# Altium PCB PATHOS_DriveBoard.PcbDoc (part 1 of 2)
Units mm, origin at the board's own origin, x right, y up, seen from the top; angles counter-clockwise.
Board outline 131 x 135 mm, 2 copper layers (Top Layer, Bottom Layer), stack 1.57 mm thick; 68 components, 99 nets, 394 pads, 251 vias.
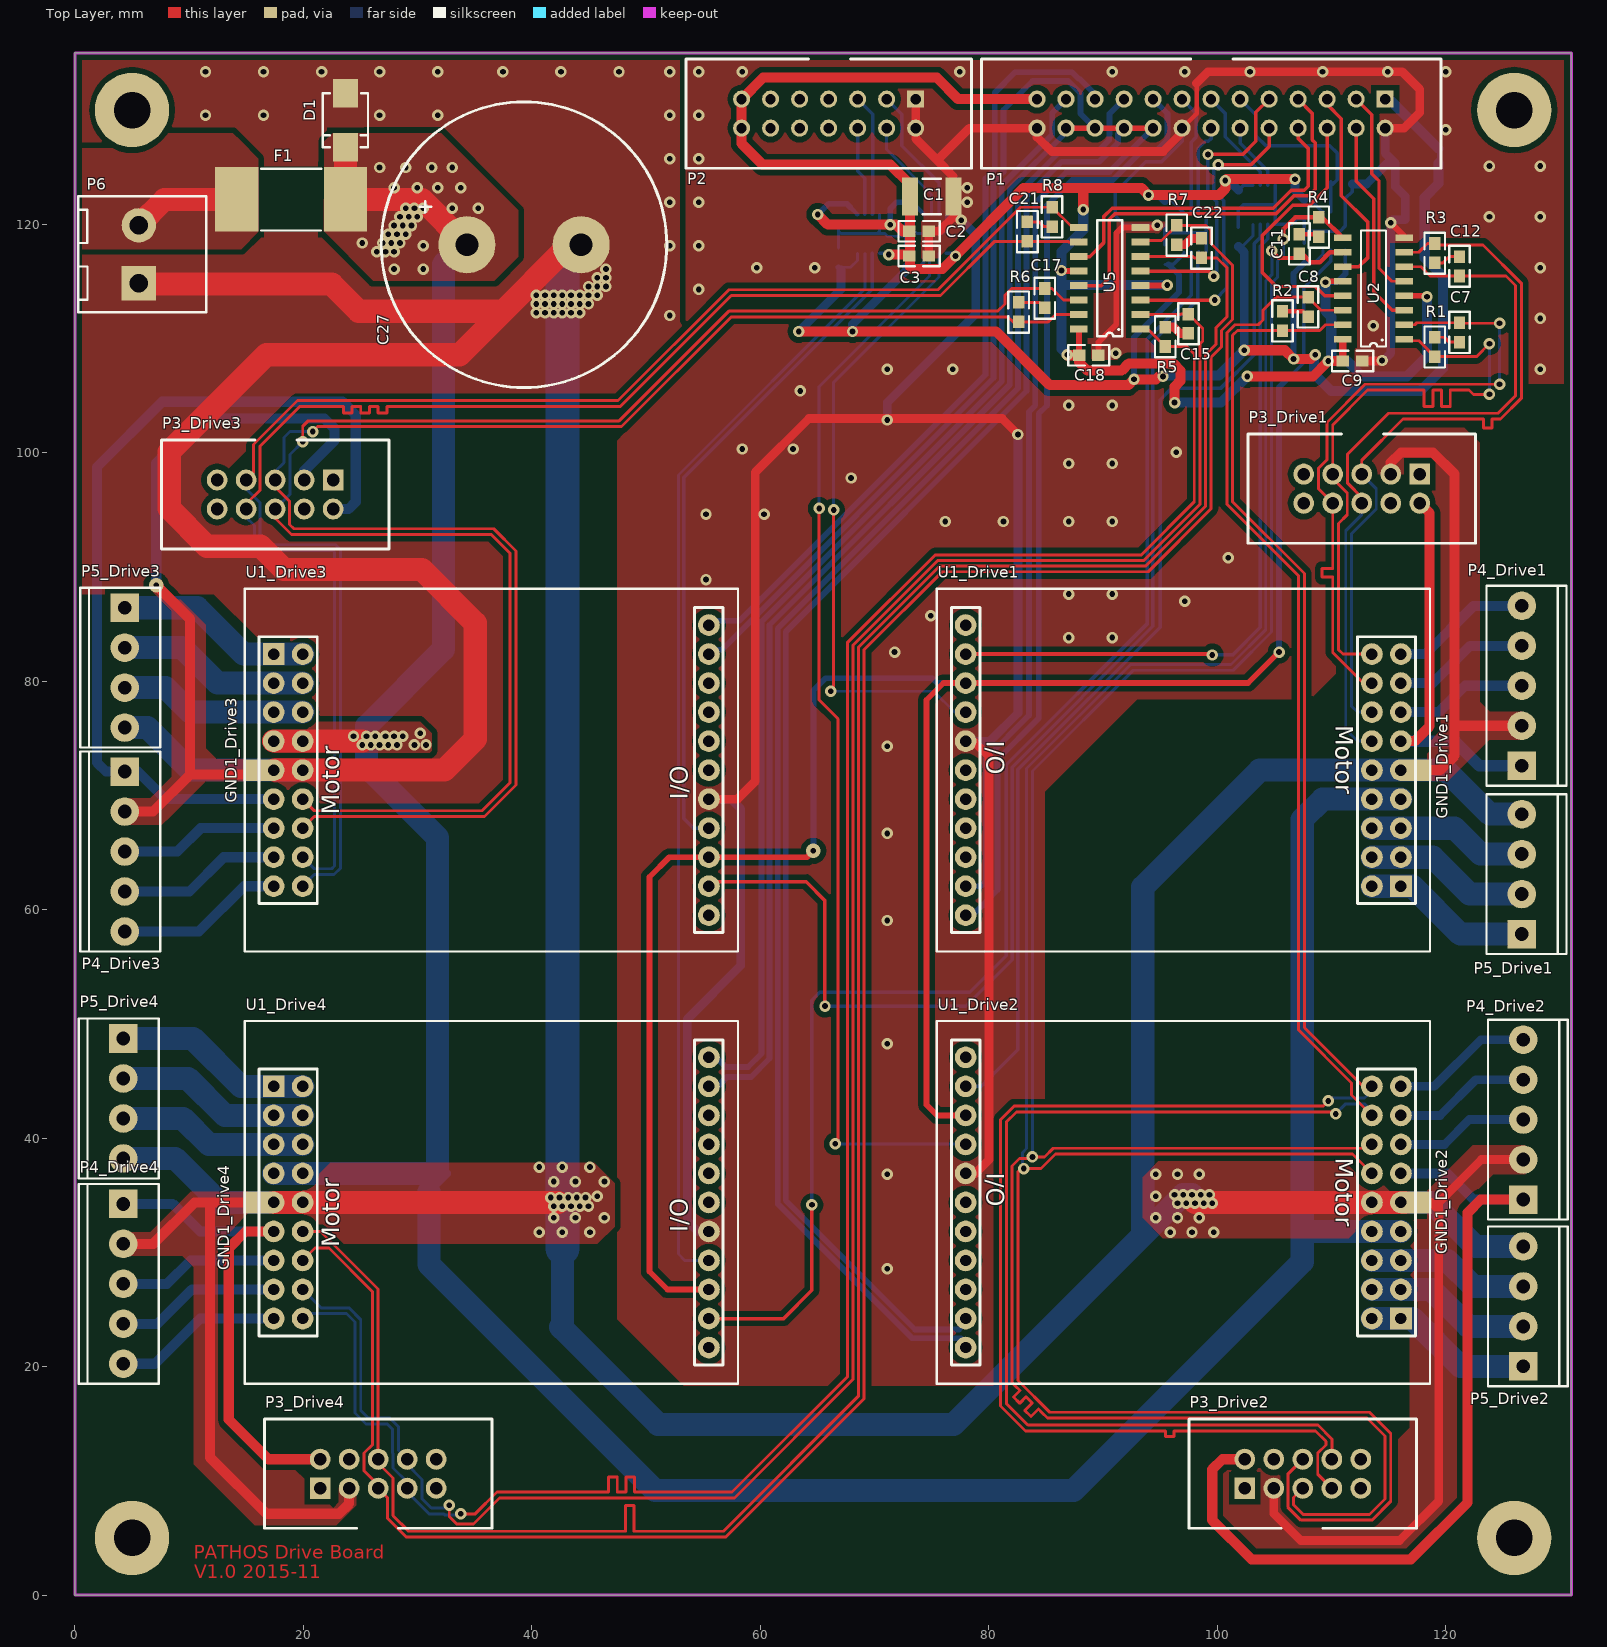
[diagram p0: Top Layer view]
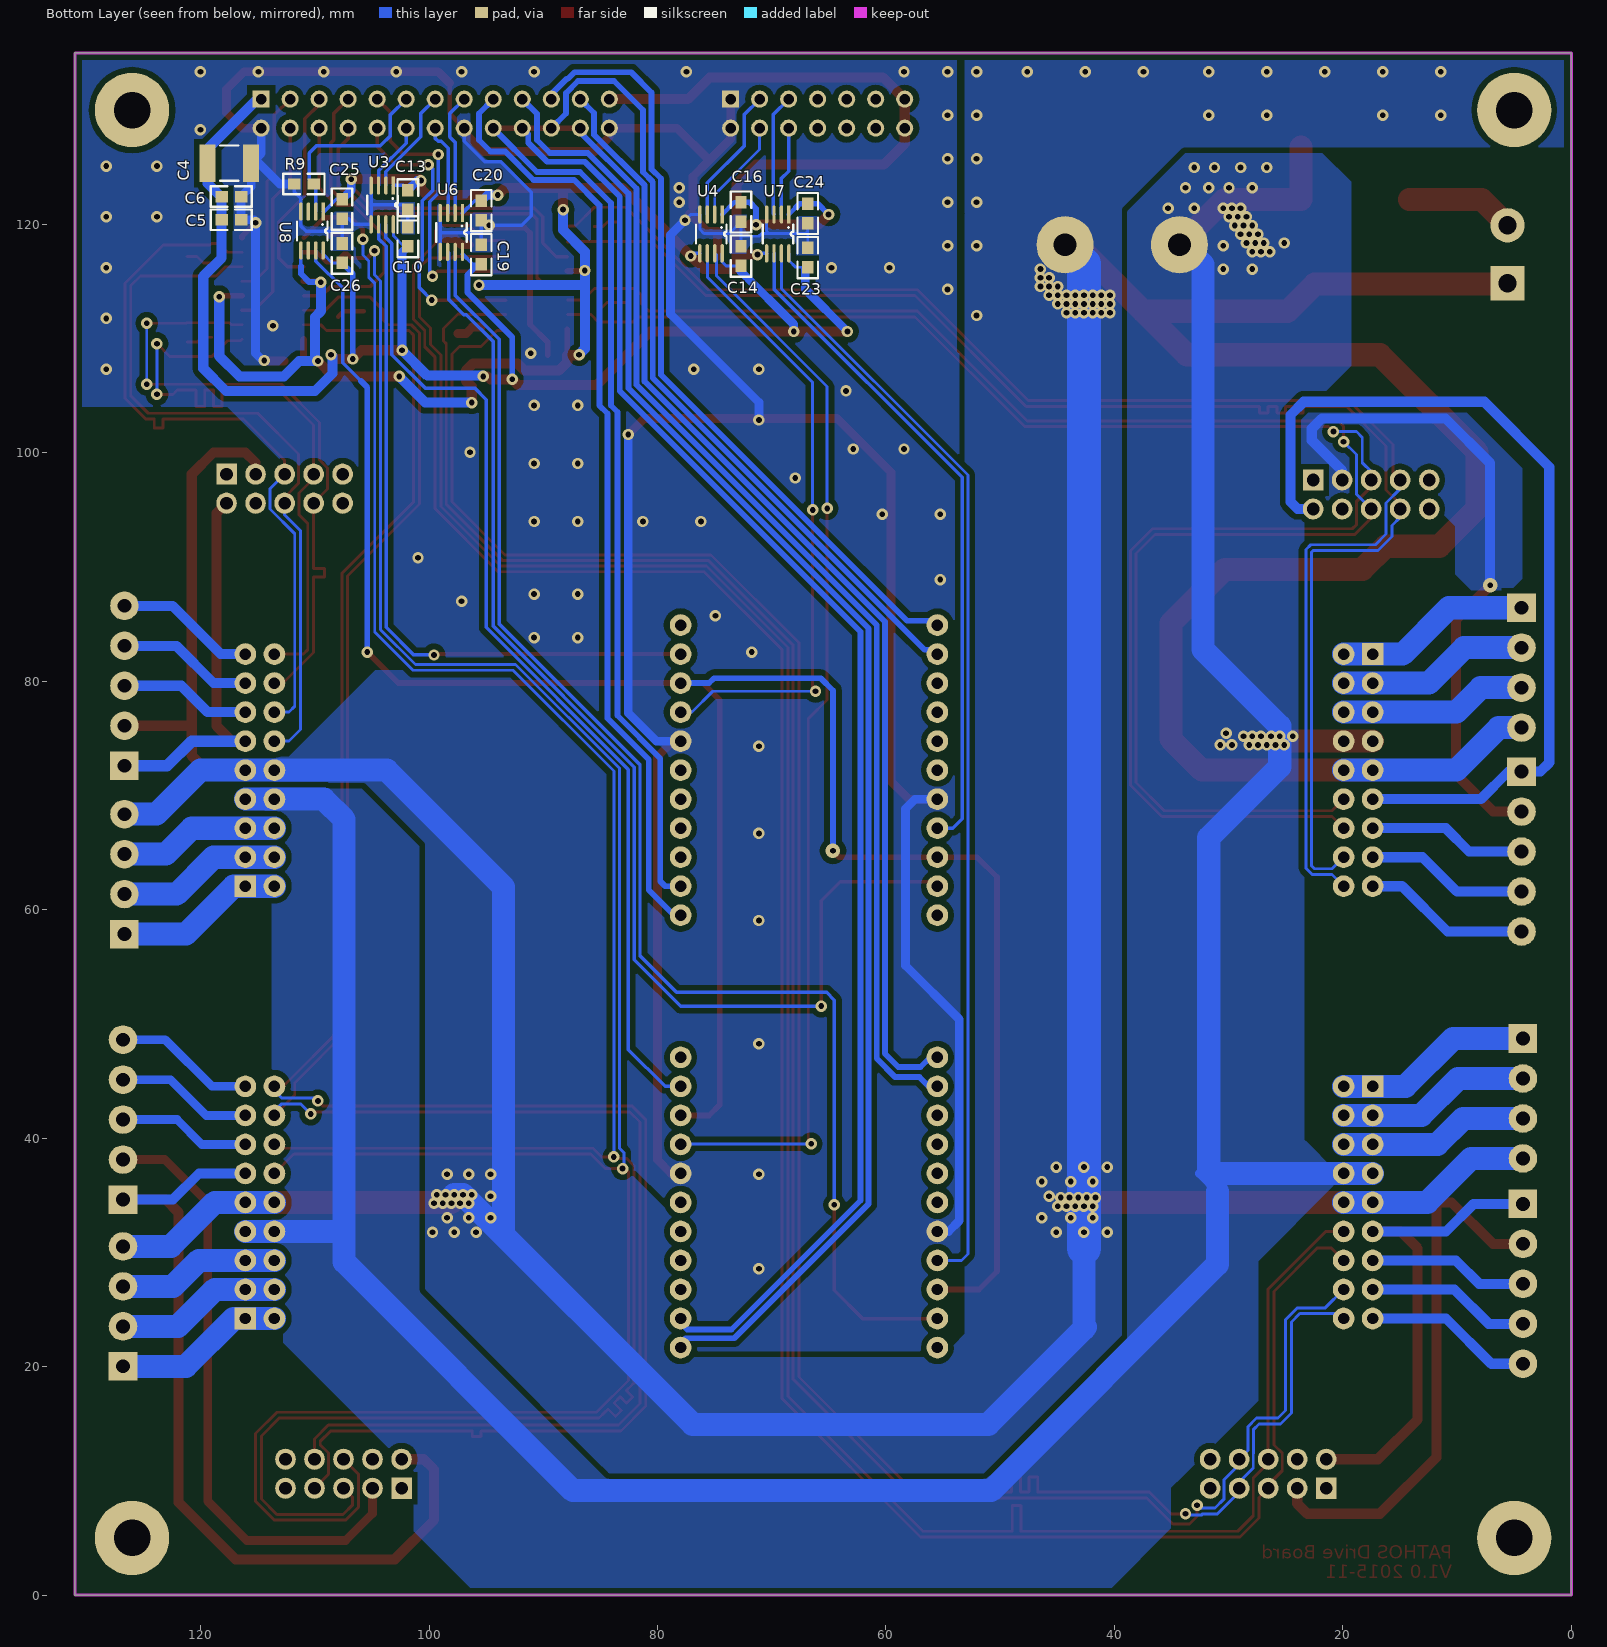
[diagram p1: Bottom Layer view, seen from below]

## Layer stack, top to bottom
Top Solder: solder mask 0.0102, Solder Resist, Dk 3.5
Top Layer: signal copper 0.035
Dielectric1: core 1.5, FR-4, Dk 4.2
Bottom Layer: signal copper 0.035
Bottom Solder: solder mask 0.0102, Solder Resist, Dk 3.5

## Board outline
0,0 131,0 131,135 0,135

## Design rules (kind name [scope] priority, off if disabled: settings)
Clearance Polygon [InPolygon] p1: gap=0.508 // Polygon Clearance
Clearance [All] p2: gap=0.203
ComponentClearance [All] p1: gap=0.254 collisioncheckmode=3 verticalgap=0.1 showdistances=FALSE
DiffPairsRouting [All] p1: maxlimit=1.524 minlimit=0.254 mostfreqgap=0.254 toplayer_minwidth=0.203 toplayer_maxwidth=0.381 toplayer_prefwidth=0.381 bottomlayer_minwidth=0.203 bottomlayer_maxwidth=0.381 bottomlayer_prefwidth=0.381 maxuncoupledlength=12.7
FabricationTestPointUsage TestPointUsage [All] p1 off: valid=0 allowmultiple=FALSE
FabricationTestpoint Testpoint [All] p1 off: side=3 testpointundercomponent=TRUE minsize=1.016 maxsize=2.54 preferedsize=1.524 minholesize=0 maxholesize=1.016 preferedholesize=0.813 testpointgrid=0.025 allowsidetop=TRUE allowsidebottom=TRUE usegrid=TRUE gridtolerance=0
FanoutControl Fanout_BGA [IsBGA] p1 off: bgadir=Out bgaviamode=Centered fanoutstyle=Auto fanoutdirection=Alternating viagrid=0.025 // Fanout_BGA (Default Rule)
FanoutControl Fanout_LCC [IsLCC] p2 off: bgadir=Out bgaviamode=Centered fanoutstyle=Auto fanoutdirection=Alternating viagrid=0.025 // Fanout_LCC (Default Rule)
FanoutControl Fanout_SOIC [IsSOIC] p3 off: bgadir=Out bgaviamode=Centered fanoutstyle=Auto fanoutdirection=Alternating viagrid=0.025 // Fanout_SOIC (Default Rule)
FanoutControl Fanout_Small [(CompPinCount < 5)] p4 off: bgadir=Out bgaviamode=Centered fanoutstyle=Auto fanoutdirection=OutThenIn viagrid=0.025 // Fanout_Small (Default Rule)
FanoutControl Fanout_Default [All] p5 off: bgadir=Out bgaviamode=Centered fanoutstyle=Auto fanoutdirection=Alternating viagrid=0.025 // Fanout_Default (Default Rule)
Height [All] p1 off: minheight=0 maxheight=25.4 prefheight=12.7
HoleSize HoleType [IsPad And HasSquareHole] p1: absolutevalues=TRUE maxlimit=0 minlimit=0 maxpercent=80.000 minpercent=20.000 // Find Square Holes
HoleSize [All] p2: absolutevalues=TRUE maxlimit=5 minlimit=0.4 maxpercent=80.000 minpercent=20.000
LayerPairs [All] p1 off: enforce=TRUE
MatchedLengths ENC_B_DIFF_4 [InNetClass('ENC_B_DIFF_4')] p1: tolerance=0.254 checknetsindiffpair=TRUE checkdiffpairvsdiffpair=TRUE checkothers=TRUE
MatchedLengths ENC_A_DIFF_4 [InNetClass('ENC_A_DIFF_4')] p2: tolerance=0.254 checknetsindiffpair=TRUE checkdiffpairvsdiffpair=TRUE checkothers=TRUE
MatchedLengths ENC_A_DIFF_3 [InNetClass('ENC_A_DIFF_3')] p3: tolerance=0.254 checknetsindiffpair=TRUE checkdiffpairvsdiffpair=TRUE checkothers=TRUE
MatchedLengths ENC_B_DIFF_3 [InNetClass('ENC_B_DIFF_3')] p4: tolerance=0.254 checknetsindiffpair=TRUE checkdiffpairvsdiffpair=TRUE checkothers=TRUE
MatchedLengths ENC_B_DIFF_2 [InNetClass('ENC_B_DIFF_2')] p5: tolerance=0.254 checknetsindiffpair=TRUE checkdiffpairvsdiffpair=TRUE checkothers=TRUE
MatchedLengths ENC_A_DIFF_2 [InNetClass('ENC_A_DIFF_2')] p6: tolerance=0.254 checknetsindiffpair=TRUE checkdiffpairvsdiffpair=TRUE checkothers=TRUE
MatchedLengths ENC_B_DIFF_1 [InNetClass('ENC_B_DIFF_1')] p7: tolerance=0.254 checknetsindiffpair=TRUE checkdiffpairvsdiffpair=TRUE checkothers=TRUE
MatchedLengths ENC_A_DIFF_1 [InNetClass('ENC_A_DIFF_1')] p8: tolerance=0.254 checknetsindiffpair=TRUE checkdiffpairvsdiffpair=TRUE checkothers=TRUE
MinimumAnnularRing "Minimum Annular Ring" [All] p1: minimumring=0.2
PasteMaskExpansion [All] p1: expansion=0.05
PolygonConnect PolygonConnectVia [IsVia] p1: connectstyle=Direct reliefconductorwidth=0.254 reliefentries=4 polygonreliefangle="90 Angle" airgapwidth=0.254 // Direct Connect Via
PolygonConnect [All] p2: connectstyle=Direct reliefconductorwidth=0.508 reliefentries=4 polygonreliefangle="45 Angle" airgapwidth=0.254
RoutingCorners [All] p1 off: cornerstyle=45-Degree minsetback=2.54 maxsetback=2.54
RoutingLayers [All] p1 off: top layer_v5=TRUE bottom layer_v5=TRUE
RoutingPriority [All] p1 off: routingpriority=0
RoutingTopology [All] p1 off: topology=Shortest
RoutingVias [All] p1: holewidth=0.4 width=0.8 viastyle="Through Hole" minholewidth=0.3 minwidth=0.7 maxholewidth=2 maxwidth=3.4
SignalStimulus "#Version Information" [All] p1 off: kind=1 level=0 starttime=10.00n stoptime=60.00n periodtime=100.00n // Version 0-9 from 2010-11-01
SilkToSolderMaskClearance SilkscreenOverComponentPads [IsPad] p1: minsilkscreentomaskgap=0.254 clearancetoexposedcopper=TRUE
SolderMaskExpansion [All] p1: expansion=0.05
Width [All] p1: maxlimit=20 minlimit=0.203 preferedwidth=0.381 minimp=50.000000 maximp=50.000000 favimp=50.000000
12 further rules are at their usual default settings.

## Classes and differential pairs
net class ENC_B_DIFF_4: ENC_B_DIFF_N4 ENC_B_DIFF_P4
net class ENC_B_DIFF_3: ENC_B_DIFF_N3 ENC_B_DIFF_P3
net class ENC_A_DIFF_4: ENC_A_DIFF_N4 ENC_A_DIFF_P4
net class ENC_A_DIFF_3: ENC_A_DIFF_N3 ENC_A_DIFF_P3
channel class PATHOS_Drive: Drive1 Drive2 Drive3 Drive4
net class READY_DRV[1..4]: READY_DRV1 READY_DRV2 READY_DRV3 READY_DRV4
net class PWM[1..4]: PWM1 PWM2 PWM3 PWM4
net class ENC_B_DIFF_P[1..4]: ENC_B_DIFF_P1 ENC_B_DIFF_P2 ENC_B_DIFF_P3 ENC_B_DIFF_P4
net class ENC_B_DIFF_N[1..4]: ENC_B_DIFF_N1 ENC_B_DIFF_N2 ENC_B_DIFF_N3 ENC_B_DIFF_N4
net class ENC_A_DIFF_P[1..4]: ENC_A_DIFF_P1 ENC_A_DIFF_P2 ENC_A_DIFF_P3 ENC_A_DIFF_P4
net class ENC_A_DIFF_N[1..4]: ENC_A_DIFF_N1 ENC_A_DIFF_N2 ENC_A_DIFF_N3 ENC_A_DIFF_N4
net class DRV_AOUT_H.AOUT_H_A[1..4]: AOUT_H_A1 AOUT_H_A2 AOUT_H_A3 AOUT_H_A4 DRV_AOUT_H.AOUT_H_A1 DRV_AOUT_H.AOUT_H_A2 DRV_AOUT_H.AOUT_H_A3 DRV_AOUT_H.AOUT_H_A4
component class PowerSupply: C27 D1 F1 P6
component class DriveConnectors: C7 C8 C9 C10 C11 C12 C13 C14 C15 C16 C17 C18 C19 C20 C21 C22 C23 C24 C25 C26 R1 R2 R3 R4 R5 R6 R7 R8 R9 U2 U3 U4 U5 U6 U7 U8
component class Drive4: GND1_Drive4 P3_Drive4 P4_Drive4 P5_Drive4 U1_Drive4
component class Drive3: GND1_Drive3 P3_Drive3 P4_Drive3 P5_Drive3 U1_Drive3
component class Drive2: GND1_Drive2 P3_Drive2 P4_Drive2 P5_Drive2 U1_Drive2
component class Drive1: GND1_Drive1 P3_Drive1 P4_Drive1 P5_Drive1 U1_Drive1
component class ControllerBoardInterface: C1 C2 C3 C4 C5 C6 P1 P2
net class ENC_A_DIFF_1: ENC_A_DIFF_N1 ENC_A_DIFF_P1
net class ENC_A_DIFF_2: ENC_A_DIFF_N2 ENC_A_DIFF_P2
net class ENC_B_DIFF_1: ENC_B_DIFF_N1 ENC_B_DIFF_P1
net class ENC_B_DIFF_2: ENC_B_DIFF_N2 ENC_B_DIFF_P2
differential pair ENC_B_DIFF4: +ENC_B_DIFF_P4 -ENC_B_DIFF_N4
differential pair ENC_B_DIFF3: +ENC_B_DIFF_P3 -ENC_B_DIFF_N3
differential pair ENC_B_DIFF2: +ENC_B_DIFF_P2 -ENC_B_DIFF_N2
differential pair ENC_B_DIFF1: +ENC_B_DIFF_P1 -ENC_B_DIFF_N1
differential pair ENC_A_DIFF4: +ENC_A_DIFF_P4 -ENC_A_DIFF_N4
differential pair ENC_A_DIFF3: +ENC_A_DIFF_P3 -ENC_A_DIFF_N3
differential pair ENC_A_DIFF2: +ENC_A_DIFF_P2 -ENC_A_DIFF_N2
differential pair ENC_A_DIFF1: +ENC_A_DIFF_P1 -ENC_A_DIFF_N1

## Components (designator, comment, footprint, x,y, rotation, side; value= is the part's Value field where it differs from the comment)
C1 "Cap" 1812 75,122.433 r180 top
C2 "Cap" 0603_3D 74.746,119.385 r180 top
C3 "Cap" 0603_3D 74.746,117.226 r180 top
C4 "Cap" 1812 117.475,125.349 r0 bottom
C5 "Cap" 0603_3D 116.459,120.396 r0 bottom
C6 "Cap" 0603_3D 116.459,122.428 r0 bottom
C7 "Cap" 0603_3D 121.205,109.681 r90 top
C8 "Cap" 0603_3D 107.95,113.618 r270 top
C9 "Cap" 0603_3D 112.696,108.03 r180 top
C10 "Cap" 0603_3D 101.854,119.761 r270 bottom
C11 "Cap" 0603_3D 107.188,117.428 r90 top
C12 "Cap" 0603_3D 121.205,117.174 r270 top
C13 "Cap" 0603_3D 101.854,121.285 r90 bottom
C14 "Cap" 0603_3D 72.691,118.063 r270 bottom
C15 "Cap" 0603_3D 97.475,110.443 r90 top
C16 "Cap" 0603_3D 72.691,120.222 r90 bottom
C17 "Cap" 0603_3D 84.902,114.38 r270 top
C18 "Cap" 0603_3D 89.601,108.538 r180 top
C19 "Cap" 0603_3D 95.424,118.19 r270 bottom
C20 "Cap" 0603_3D 95.424,120.349 r90 bottom
C21 "Cap" 0603_3D 83.378,118.508 r90 top
C22 "Cap" 0603_3D 98.618,118.762 r270 top
C23 "Cap" 0603_3D 66.849,117.936 r270 bottom
C24 "Cap" 0603_3D 66.849,120.095 r90 bottom
C25 "Cap" 0603_3D 107.616,120.476 r90 bottom
C26 "Cap" 0603_3D 107.616,118.317 r270 bottom
C27 "10mF" Cap_SLP_C7_10mF 34.315,118.212 r0 top
D1 "SMBJ54A" TVS_DO214AA 23.673,129.108 r270 top
F1 "Fuse 1" Fuse40ASMD 18.923,122.174 r0 top
GND1_Drive1 "Starpoint DGND - PWR_GND" NETTIEPWRGND 116.967,72.216 r90 top net-tie (schematic designator GND1)
GND1_Drive2 "Starpoint DGND - PWR_GND" NETTIEPWRGND 116.967,34.37 r90 top net-tie (schematic designator GND1)
GND1_Drive3 "Starpoint DGND - PWR_GND" NETTIEPWRGND 16.51,72.216 r270 top net-tie (schematic designator GND1)
GND1_Drive4 "Starpoint DGND - PWR_GND" NETTIEPWRGND 16.51,34.37 r270 top net-tie (schematic designator GND1)
P1 "Header 2x13" Wannenstecker26Pol 114.7,130.953 r0 top
P2 "Header 2x7" Wannenstecker14Pol 73.6,130.953 r0 top
P3_Drive1 "Connector Encoder" "WANNENSTECKER 2X5 - H" 117.729,98.124 r180 top (schematic designator P3)
P3_Drive2 "Connector Encoder" "WANNENSTECKER 2X5 - H" 102.409,9.351 r0 top (schematic designator P3)
P3_Drive3 "Connector Encoder" "WANNENSTECKER 2X5 - H" 22.606,97.616 r180 top (schematic designator P3)
P3_Drive4 "Connector Encoder" "WANNENSTECKER 2X5 - H" 21.463,9.351 r0 top (schematic designator P3)
P4_Drive1 "Connector Hall Sensors" PhoenixHeaderScrew_3_5mm_5pol 126.666,72.597 r180 top (schematic designator P4)
P4_Drive2 "Connector Hall Sensors" PhoenixHeaderScrew_3_5mm_5pol 126.793,34.624 r180 top (schematic designator P4)
P4_Drive3 "Connector Hall Sensors" PhoenixHeaderScrew_3_5mm_5pol 4.365,72.089 r0 top (schematic designator P4)
P4_Drive4 "Connector Hall Sensors" PhoenixHeaderScrew_3_5mm_5pol 4.238,34.243 r0 top (schematic designator P4)
P5_Drive1 "Motor Header" PhoenixHeaderScrew_3_5mm_4pol 126.666,57.865 r180 top (schematic designator P5)
P5_Drive2 "Motor Header" PhoenixHeaderScrew_3_5mm_4pol 126.793,20.019 r180 top (schematic designator P5)
P5_Drive3 "Motor Header" PhoenixHeaderScrew_3_5mm_4pol 4.365,86.44 r0 top (schematic designator P5)
P5_Drive4 "Motor Header" PhoenixHeaderScrew_3_5mm_4pol 4.238,48.721 r0 top (schematic designator P5)
P6 "Header 24V Power Supply for Drives" PhoenixHeader5_08_Vertical_unsymetric 5.588,114.833 r90 top
R1 "Res2" 0603_3D 119.046,108.411 r90 top
R2 "Res2" 0603_3D 105.711,110.697 r90 top
R3 "Res2" 0603_3D 119.046,118.317 r270 top
R4 "Res2" 0603_3D 108.886,120.603 r270 top
R5 "Res2" 0603_3D 95.443,109.3 r90 top
R6 "Res2" 0603_3D 82.616,111.459 r90 top
R7 "Res2" 0603_3D 96.459,119.905 r270 top
R8 "Res2" 0603_3D 85.537,121.492 r270 top
R9 "Res2" 0603_3D 111.807,123.524 r180 bottom
U1_Drive1 "Maxon ESCON 50/5 Drive" ESCON_MODULE_50/5 116.078,62.056 r180 top (schematic designator U1)
U1_Drive2 "Maxon ESCON 50/5 Drive" ESCON_MODULE_50/5 116.078,24.21 r180 top (schematic designator U1)
U1_Drive3 "Maxon ESCON 50/5 Drive" ESCON_MODULE_50/5 17.399,82.376 r0 top (schematic designator U1)
U1_Drive4 "Maxon ESCON 50/5 Drive" ESCON_MODULE_50/5 17.399,44.53 r0 top (schematic designator U1)
U2 "AM26LV32CD" SOP16 116.379,109.935 r180 top
U3 "74LVC2T45" 74LVC2T45 103.124,123.397 r270 bottom
U4 "74LVC2T45" 74LVC2T45 74.342,120.857 r270 bottom
U5 "AM26LV32CD" SOP16 93.284,110.824 r180 top
U6 "74LVC2T45" 74LVC2T45 97.075,120.984 r270 bottom
U7 "74LVC2T45" 74LVC2T45 68.5,120.857 r270 bottom
U8 "74LVC2T45" 74LVC2T45 109.267,121.111 r270 bottom

## Footprints (in the part's own frame and the unit in brackets; to place one, negate y for a bottom-side part, rotate by r counter-clockwise, add the part's x,y. Pads: shape width x height; smd on the part's side, far side on the other; paste and mask are expansions set on the pad)
74LVC2T45 [mm]
  rect 1.6x0.3 smd: 1(0,0)
  oval 1.6x0.3 smd: 2(0,-0.65) 3(0,-1.3) 4(0,-1.95) 5(3.4,-1.95) 6(3.4,-1.3) 7(3.4,-0.65) 8(3.4,0)
  silkscreen extent 0.89,-2.29 2.54,0.38
0603_3D [mm] "SMD Chip 0603"
  rect 1.1x1 smd: 1(0,0) 2(1.7,0)
  silkscreen extent -0.95,-0.9 2.65,0.9, body extent -0.13,-0.51 1.78,0.51, height 0.6
1812 [mm] "Chip Capacitor, Body 4.5x3.2mm, IPC High Density"
  rect 1.4x3.3 smd: 1(-1.9,0) 2(1.9,0)
  silkscreen extent -0.8,-1.55 0.8,1.55, body extent -2.4,-1.7 2.4,1.7, height 1.4
Cap_SLP_C7_10mF [mm]
  round 5 hole 2: 1(0,0) 2(10,0)
  silkscreen extent -7.5,-12.5 17.5,12.5
ESCON_MODULE_50/5 [mm]
  rect 1.9x1.9 hole 1: 1(0,0)
  round 1.9 hole 1: 2(2.54,0) 3(0,-2.54) 4(2.54,-2.54) 5(0,-5.08) 6(2.54,-5.08) 7(0,-7.62) 8(2.54,-7.62) 9(0,-10.16) 10(2.54,-10.16) 11(0,-12.7) 12(2.54,-12.7) 13(0,-15.24) 14(2.54,-15.24) 15(0,-17.78) 16(2.54,-17.78) 17(0,-20.32) 18(2.54,-20.32) 19(38.1,-22.86) 20(38.1,-20.32) 21(38.1,-17.78) 22(38.1,-15.24) 23(38.1,-12.7) 24(38.1,-10.16) 25(38.1,-7.62) 26(38.1,-5.08) 27(38.1,-2.54) 28(38.1,0) 29(38.1,2.54)
  silkscreen extent -2.54,-26.04 40.64,5.72, body extent -2.54,-26.04 40.64,5.72, height 12.65
Fuse40ASMD [mm]
  rect 3.79x5.65 smd: 1(-4.755,0) 2(4.755,0)
  silkscreen extent -2.63,-2.72 2.63,2.69
NETTIEPWRGND [mm]
  rect 1.9x1.8 smd: 1(0,0)
  rect 1.9x1.6 smd: 2(0,-1)
PhoenixHeader5_08_Vertical_unsymetric [mm]
  rect 3x3 hole 1.6: 1(0,0)
  round 3 hole 1.6: 2(5.08,0)
  silkscreen extent -2.54,-5.9 7.62,5.3, body extent -2.54,-5.9 7.62,5.3, height 18
PhoenixHeaderScrew_3_5mm_4pol [mm]
  rect 2.5x2.5 hole 1.2: 1(0,0)
  round 2.5 hole 1.2: 2(0,-3.5) 3(0,-7) 4(0,-10.5)
  silkscreen extent -3.9,-12.25 3.1,1.75, body extent -3.9,-12.25 3.1,1.75, height 9.2
PhoenixHeaderScrew_3_5mm_5pol [mm]
  rect 2.5x2.5 hole 1.2: 1(0,0)
  round 2.5 hole 1.2: 2(0,-3.5) 3(0,-7) 4(0,-10.5) 5(0,-14)
  silkscreen extent -3.9,-15.75 3.1,1.75, body extent -3.9,-15.75 3.1,1.75, height 9.2
SOP16 [mm]
  rect 1.55x0.6 smd: 1(0,0) 2(0,-1.27) 3(0,-2.54) 4(0,-3.81) 5(0,-5.08) 6(0,-6.35) 7(0,-7.62) 8(0,-8.89) 9(5.4,-8.89) 10(5.4,-7.62) 11(5.4,-6.35) 12(5.4,-5.08) 13(5.4,-3.81) 14(5.4,-2.54) 15(5.4,-1.27) 16(5.4,0)
  silkscreen extent 1.61,-9.53 3.79,0.64
TVS_DO214AA [mm]
  rect 2.5x2.2 smd: A(-2.35,0) K(2.35,0)
  silkscreen extent -2.37,-1.98 2.37,1.98
Wannenstecker14Pol [mm]
  rect 1.5x1.5 hole 0.9: 1(0,0)
  round 1.5 hole 0.9: 2(0,-2.54) 3(-2.54,0) 4(-2.54,-2.54) 5(-5.08,0) 6(-5.08,-2.54) 7(-7.62,0) 8(-7.62,-2.54) 9(-10.16,0) 10(-10.16,-2.54) 11(-12.7,0) 12(-12.7,-2.54) 13(-15.24,0) 14(-15.24,-2.54)
  silkscreen extent -20.11,-6.04 4.87,3.5, body extent -20.11,-6.04 4.87,3.5, height 9.57
Wannenstecker26Pol [mm]
  rect 1.5x1.5 hole 0.9: 1(0,0)
  round 1.5 hole 0.9: 2(0,-2.54) 3(-2.54,0) 4(-2.54,-2.54) 5(-5.08,0) 6(-5.08,-2.54) 7(-7.62,0) 8(-7.62,-2.54) 9(-10.16,0) 10(-10.16,-2.54) 11(-12.7,0) 12(-12.7,-2.54) 13(-15.24,0) 14(-15.24,-2.54) 15(-17.78,0) 16(-17.78,-2.54) 17(-20.32,0) 18(-20.32,-2.54) 19(-22.86,0) 20(-22.86,-2.54) 21(-25.4,0) 22(-25.4,-2.54) 23(-27.94,0) 24(-27.94,-2.54) 25(-30.48,0) 26(-30.48,-2.54)
  silkscreen extent -35.35,-6.04 4.87,3.5, body extent -35.35,-6.05 4.85,3.5, height 9.57
"WANNENSTECKER 2X5 - H" [mm]
  rect 1.8x1.85 hole 1.1: 1(0,0)
  oval 1.8x1.85 hole 1.1: 2(0,2.54) 3(2.54,0) 4(2.54,2.54) 5(5.08,0) 6(5.08,2.54) 7(7.62,0) 8(7.62,2.54) 9(10.16,0) 10(10.16,2.54)
  silkscreen extent -4.87,-3.5 15.03,6.04, body extent -4.87,-3.52 15.02,6.02, height 9.57

## Part data
C1 C2 C3 C4 C5 C6 C7 C8 C9 C10 C11 C12 C13 C14 C15 C16 C17 C18 C19 C20 C21 C22 C23 C24 C25 C26: "Capacitor"
C27: library part C_POL, "Polarized Capacitor Positive Mark Bar"
D1: library part "Diode SMBJ54A", "TVS Diode"
F1: "Fuse"
GND1_Drive1 GND1_Drive2 GND1_Drive3 GND1_Drive4: library part NetTie_PWR_GND
P1: "Header, 13-Pin, Dual row"
P2: "Header, 7-Pin, Dual row"
P3_Drive1 P3_Drive2 P3_Drive3 P3_Drive4: library part "Header 5X2", "Header, 5-Pin, Dual row"
P4_Drive1 P4_Drive2 P4_Drive3 P4_Drive4: library part "Header 5", "Header, 5-Pin"
P5_Drive1 P5_Drive2 P5_Drive3 P5_Drive4: library part "Header 4", "Header, 4-Pin"
P6: library part "Header 2", "Header, 2-Pin"
R1 R2 R3 R4 R5 R6 R7 R8 R9: "Resistor"
U1_Drive1 U1_Drive2 U1_Drive3 U1_Drive4: library part DRV_ESCON_50_5, "Maxon Drive 4Q"
U3 U4 U6 U7 U8: "SN74LVC2T45DCTR"

## Free pads (board coordinates)
  round 6.5 hole 3.2: 0(5,5) 0(5,130) 0(126,5) 0(126,130)

## Via types
v1: diameter 1, hole 0.5, Top Layer to Bottom Layer, 249 vias
v2: diameter 1.27, hole 0.5, Top Layer to Bottom Layer, 2 vias

## Nets (pads, with @x,y where several pads share a name; then routed paths per layer and width w, separated by ;. In a path a pad name is that pad's centre, name@x,y a point inside that pad or via, vN(x,y) a via of type N, cw(c..) or ccw(c..) an arc to the next point about the centre after c; other vN are vias at no path point)
AGND: P1.18 P1.20 P1.22 P1.24 U1_Drive1.28 U1_Drive2.28 U1_Drive3.28 U1_Drive4.28 | length 381.4
  Top Layer w0.508: P1.24@86.76,128.413 P1.22@89.3,128.413 P1.20@91.84,128.413 P1.18@94.38,128.413
  Bottom Layer w0.508: U1_Drive3.28@55.499,82.757 56.636,82.757 80.416,106.538 80.416,123.713 81.28,124.577 81.28,130.001 83.82,132.541 86.958,132.541 88.018,131.481 88.018,129.709 88.011,129.702 P1.22@89.3,128.413 ; U1_Drive4.28@56.134,44.403 57.07,45.339 59.182,45.339 60.808,46.965 60.808,84.917 81.839,105.948 81.839,123.124 86.76,128.045 P1.24@86.76,128.413 ; U1_Drive1.28@77.978,62.056 79.328,62.056 79.756,62.484 79.756,73.237 83.507,76.988 83.507,103.563 84.074,104.13 84.074,121.865 86.796,124.587 90.554,124.587 P1.18@94.38,128.413 ; U1_Drive2.28@78.359,24.21 77.39,23.241 73.533,23.241 62.23,34.544 62.23,84.328 83.312,105.41 83.312,122.428 86.36,125.476 89.662,125.476 91.32,127.134 91.32,127.893 P1.20@91.84,128.413
DGND: C1.1 C2.1 C3.1 C4.1 C5.1 C6.1 C9.1 C10.1 C13.1 C14.1 C16.1 C18.1 C19.1 C20.1 C23.1 C24.1 C25.1 C26.1 P1.2 P1.16 P1.26 P2.1 P2.2 R9.1 U1_Drive1.23 U1_Drive2.23 U1_Drive3.23 U1_Drive4.23 U2.8 U3.4 U3.5 U4.4 U5.8 U6.4 U6.5 U7.4 U8.4 | length 375
  Top Layer w0.305: v1@94.532,119.714 v1(94.742,119.924)
  Top Layer w0.381: P1.16@96.92,128.413 98.19,129.683 98.19,132.353
  Top Layer w0.508: C18.1@89.601,108.538 89.601,109.667 91.161,111.227 91.161,119.228 91.647,119.714 U5.8@93.284,119.714 v1@94.532,119.714 ; v1(115.189,120.142) 116.379,118.952 U2.8@116.379,118.825
  Top Layer w0.762: U1_Drive3.23@55.499,69.676 57.992,69.676 59.563,71.247 59.563,98.298 64.262,102.997 81.153,102.997 v1(82.55,101.6) ; P2.1@73.6,130.953 P2.2@73.6,128.413 73.6,127.483 75.483,125.601 ; C3.1@74.746,117.226 C2.1@74.746,119.385 75.664,119.385 77.049,120.77 ; C1.1@76.9,121.539 C1.1@76.9,122.433 76.9,124.183 75.483,125.601 ; v1@77.534,120.286 77.049,120.77 ; U1_Drive2.23@77.978,36.91 78.82,36.91 80.01,38.1 80.01,73.406 78.66,74.756 U1_Drive1.23@77.978,74.756 ; P1.16@96.92,128.413 96.92,128.035 95.25,126.365 85.502,126.365 84.22,127.647 P1.26@84.22,128.413 78.295,128.413 75.483,125.601 ; 98.19,132.353 99.187,133.35 116.205,133.35 117.729,131.826 117.729,129.794 116.348,128.413 P1.2@114.7,128.413 ; C9.1@112.696,108.03 114.38,108.03 v1(114.427,108.077) ; 77.049,120.77 76.9,120.919 77.198,120.919 77.049,120.77
  Bottom Layer w0.254: C23.1@66.849,117.936 66.849,119.413 ; C24.1@66.849,120.095 66.849,119.413 ; 70.231,119.206 70.45,119.425 U7.4@70.45,120.857 ; C14.1@72.691,118.063 72.691,118.952 ; v1(77.597,120.349) 77.089,120.857 U4.4@76.292,120.857 76.292,119.552 75.946,119.206 73.707,119.206 C16.1@72.691,120.222 72.691,118.952 ; 66.849,119.413 67.056,119.206 70.89,119.206 71.144,118.952 72.691,118.952
  Bottom Layer w0.305: v1(94.742,119.924) 91.892,119.924 91.059,120.757 91.059,122.809 93.726,125.476 95.123,125.476 96.92,127.273 P1.16@96.92,128.413 ; C19.1@95.424,118.19 95.424,119.27 ; C20.1@95.424,119.924 95.424,119.27 ; U6.5@99.025,117.584 99.025,119.284 ; U6.4@99.025,120.984 99.025,119.284 ; C10.1@101.854,119.761 C13.1@101.854,121.285 102.266,121.697 105.074,121.697 ; U3.4@105.074,123.397 105.074,121.697 ; C26.1@107.616,118.317 107.616,119.397 ; R9.1@111.807,123.524 111.807,122.856 111.217,122.266 U8.4@111.217,121.111 111.217,119.853 110.761,119.397 107.616,119.397 ; 95.424,119.27 99.011,119.27 99.025,119.284 ; 105.074,121.697 U3.5@105.074,119.997 106.535,119.997 107.014,120.476 C25.1@107.616,120.476 107.616,119.397
  Bottom Layer w0.762: U1_Drive4.23@55.499,31.83 54.53,31.83 53.594,32.766 53.594,50.419 58.293,55.118 58.293,68.834 57.451,69.676 U1_Drive3.23@55.499,69.676 ; v1(71.12,102.87) 71.12,104.394 78.867,112.141 78.867,119.079 v1(77.597,120.349) ; U1_Drive1.23@77.978,74.756 80.09,74.756 82.55,77.216 v1(82.55,101.6) ; R9.1@111.807,123.524 113.063,123.524 114.888,125.349 C4.1@115.575,125.349 ; v1(114.427,108.077) 114.554,108.077 115.189,108.712 v1(115.189,120.142) 115.062,120.142 115.316,120.396 C5.1@116.459,120.396 C6.1@116.459,122.428 115.575,123.312 C4.1@115.575,125.349 ; P1.2@114.7,128.413 114.7,126.224 C4.1@115.575,125.349
  other v1: 71.12,28.575 71.12,36.83 71.12,48.26 71.12,59.055 71.12,66.675 71.12,74.295 71.755,82.55 86.995,83.82 90.805,83.82 74.93,85.725 97.155,86.995 86.995,87.63 90.805,87.63 55.245,88.9 100.965,90.805 76.2,93.98 81.28,93.98 86.995,93.98 90.805,93.98 55.245,94.615 60.325,94.615 67.945,97.79 86.995,99.06 90.805,99.06 96.418,100.051 58.42,100.33 62.865,100.33 86.995,104.14 90.805,104.14 63.5,105.41 71.12,107.315 76.835,107.315 128.27,107.315 91.11,108.712 113.665,111.125 128.27,111.76 54.61,114.3 59.69,116.205 64.77,116.205 128.27,116.205 54.61,118.11 123.825,120.65 128.27,120.65 54.61,121.92 78.105,121.92 78.105,123.19 123.825,125.095 128.27,125.095 54.61,125.73 120.015,128.27 54.61,129.54 54.61,133.35 58.42,133.35 77.47,133.35 90.805,133.35 97.155,133.35 102.87,133.35 109.22,133.35 114.935,133.35 120.015,133.35
DGND_ENC_Drive1: GND1_Drive1.2 P3_Drive1.3 P4_Drive1.2 | length 41.1
  Top Layer w0.889: P3_Drive1.3@115.189,98.124 115.189,99.14 116.078,100.029 118.872,100.029 120.777,98.124 120.777,76.097 ; GND1_Drive1.2@118.451,72.216 119.507,72.216 120.777,73.486 120.777,76.097 ; P4_Drive1.2@126.666,76.097 120.777,76.097
DGND_ENC_Drive2: GND1_Drive2.2 P3_Drive2.3 P4_Drive2.2 | length 55.4
  Top Layer w0.762: P3_Drive2.3@104.949,9.351 104.949,7.145 107.315,4.779 115.951,4.779 119.38,8.208 119.38,33.735 ; GND1_Drive2.2@118.451,34.37 118.745,34.37 119.38,33.735 ; P4_Drive2.2@126.793,38.124 123.134,38.124 119.38,34.37 119.38,33.735
DGND_ENC_Drive3: GND1_Drive3.2 P3_Drive3.3 P4_Drive3.2 | length 64.3
  Top Layer w0.889: P4_Drive3.2@4.365,68.589 6.839,68.589 10.085,71.835 ; v2(7.112,88.392) 10.085,85.419 10.085,71.835 ; GND1_Drive3.2@15.637,71.835 10.085,71.835
  Bottom Layer w0.889: v2(7.112,88.392) 7.112,99.089 11.025,103.002 21.839,103.002 22.733,102.108 22.733,101.092 20.066,98.425 P3_Drive3.3@20.066,97.616
DGND_ENC_Drive4: GND1_Drive4.2 P3_Drive4.3 P4_Drive4.2 | length 51
  Top Layer w0.889: P4_Drive4.2@4.238,30.743 6.867,30.743 10.494,34.37 11.811,34.37 ; GND1_Drive4.2@15.51,34.37 11.811,34.37 ; P3_Drive4.3@24.003,9.351 24.003,8.001 23.114,7.112 16.764,7.112 11.811,12.065 11.811,34.37
DRV_AOUT_H.AOUT_H_A1: P1.17 U1_Drive1.29 | length 82.4
  Bottom Layer w0.508: U1_Drive1.29@77.978,59.516 78.566,59.516 80.772,61.722 80.772,73.152 84.379,76.759 84.379,103.429 85.09,104.14 85.09,121.666 87.3,123.876 90.849,123.876 93.338,126.365 94.615,126.365 95.631,127.381 95.631,127.878 95.638,127.885 95.638,129.695 P1.17@94.38,130.953
DRV_AOUT_H.AOUT_H_A2: P1.19 U1_Drive2.29 | length 133.3
  Bottom Layer w0.508: U1_Drive2.29@78.359,21.67 77.55,22.479 73.289,22.479 61.519,34.249 61.519,84.623 82.55,105.654 82.55,122.682 86.101,126.233 89.413,126.233 90.551,127.371 90.551,127.885 90.558,127.892 90.558,129.671 P1.19@91.84,130.953
DRV_AOUT_H.AOUT_H_A3: P1.21 U1_Drive3.29 | length 69.2
  Bottom Layer w0.254: P1.21@88.964,130.953 P1.21@89.3,130.953 P1.21@89.3,131.379
  Bottom Layer w0.508: U1_Drive3.29@55.499,85.297 58.17,85.297 79.705,106.832 79.705,124.008 80.518,124.821 80.518,131.525 82.296,133.303 87.274,133.303 87.845,132.732 87.948,132.732 P1.21@89.3,131.379
DRV_AOUT_H.AOUT_H_A4: P1.23 U1_Drive4.29 | length 99.4
  Bottom Layer w0.508: U1_Drive4.29@56.134,47.07 56.976,46.228 58.928,46.228 60.096,47.396 60.096,85.212 81.128,106.243 81.128,123.419 85.553,127.844 85.553,129.746 P1.23@86.76,130.953
DRV_EXT_CON.ENABLE_DRV: P1.11 R9.2 U8.2 | length 17.2
  Bottom Layer w0.305: P1.11@102,130.953 103.378,129.575 103.378,127.762 104.267,126.873 109.855,126.873 110.49,126.238 110.49,123.907 R9.2@110.107,123.524 109.917,123.714 U8.2@109.917,121.111
DRV_EXT_CON.ENC_A1: P1.3 U2.5 | length 18.3
  Top Layer w0.254: 113.919,124.032 114.173,123.778 114.173,116.119 115.277,115.015 U2.5@116.379,115.015
  Top Layer w0.305: P1.3@112.16,130.953 113.538,129.575 113.538,124.413 113.919,124.032
DRV_EXT_CON.ENC_A2: P1.5 U2.11 | length 17.9
  Top Layer w0.305: P1.5@109.62,130.953 109.62,130.49 110.871,129.239 110.871,122.508 113.157,120.222 113.157,117.047 112.395,116.285 U2.11@110.979,116.285
DRV_EXT_CON.ENC_A3: P1.7 U5.13 | length 35.7
  Top Layer w0.305: U5.13@87.884,114.634 89.854,114.634 90.551,115.331 90.551,120.44 91.015,120.904 105.112,120.904 106.685,122.477 107.999,122.477 108.585,123.063 108.585,127.127 108.331,127.381 108.331,129.702 P1.7@107.08,130.953
DRV_EXT_CON.ENC_A4: P1.9 U5.5 | length 26.5
  Top Layer w0.305: U5.5@93.284,115.904 99.234,115.904 v1(99.695,115.443) ; v1(99.187,126.111) 102.235,126.111 103.378,127.254 103.378,129.791 P1.9@104.54,130.953
  Bottom Layer w0.305: v1(99.187,126.111) 99.187,122.726 99.949,121.964 99.949,115.697 v1(99.695,115.443)
DRV_EXT_CON.ENC_B1: P1.4 U2.3 | length 18.3
  Top Layer w0.305: P1.4@112.16,128.413 112.16,123.759 113.69,122.229 113.69,114.101 115.316,112.475 U2.3@116.379,112.475
DRV_EXT_CON.ENC_B2: P1.6 U2.13 | length 23.8
  Top Layer w0.305: P1.6@109.62,128.413 109.62,123.209 108.077,121.666 106.593,121.666 103.919,118.993 103.919,115.791 105.156,114.554 108.585,114.554 109.394,113.745 U2.13@110.979,113.745
DRV_EXT_CON.ENC_B3: P1.8 U5.11 | length 29.4
  Top Layer w0.305: U5.11@87.884,117.174 88.853,117.174 90.043,118.364 90.043,120.65 90.805,121.412 104.902,121.412 106.475,122.985 107.618,122.985 107.95,123.317 107.95,126.638 107.08,127.508 P1.8@107.08,128.413
DRV_EXT_CON.ENC_B4: P1.10 U5.3 | length 26.1
  Top Layer w0.305: U5.3@93.284,113.364 v1(99.775,113.364) ; v1(100.076,125.222) 102.953,125.222 104.54,126.809 P1.10@104.54,128.413
  Bottom Layer w0.305: v1(99.775,113.364) 100.838,114.427 100.838,116.586 100.584,116.84 100.584,122.047 99.695,122.936 99.695,124.841 v1(100.076,125.222)
DRV_EXT_CON.IO_PWM_1: P2.3 U4.3 | length 12
  Bottom Layer w0.305: P2.3@71.06,130.953 72.39,129.623 72.39,126.873 75.642,123.621 U4.3@75.642,120.857
DRV_EXT_CON.IO_PWM_2: P2.4 U4.2 | length 9.2
  Bottom Layer w0.254: P2.4@71.06,128.413 71.06,126.552 74.992,122.62 U4.2@74.992,120.857
DRV_EXT_CON.IO_PWM_3: P2.5 U7.3 | length 10.7
  Bottom Layer w0.305: P2.5@68.52,130.953 69.85,129.623 69.85,120.907 U7.3@69.8,120.857
DRV_EXT_CON.IO_PWM_4: P2.6 U7.2 | length 7.8
  Bottom Layer w0.305: P2.6@68.52,128.413 68.52,124.647 69.15,124.017 U7.2@69.15,120.857
DRV_EXT_CON.IO_PWM_5: P2.7
DRV_EXT_CON.IO_PWM_6: P2.8
DRV_EXT_CON.IO_PWM_7: P2.9
DRV_EXT_CON.IO_PWM_8: P2.10
DRV_EXT_CON.IO_PWM_9: P2.11
DRV_EXT_CON.IO_PWM_10: P2.12
DRV_EXT_CON.READY_DRV_1: P1.12 U3.3 | length 6
  Bottom Layer w0.305: P1.12@102,128.413 102,127.108 104.424,124.684 U3.3@104.424,123.397
DRV_EXT_CON.READY_DRV_2: P1.13 U3.2 | length 9.3
  Bottom Layer w0.305: P1.13@99.46,130.953 100.711,129.702 100.711,127.679 103.774,124.616 U3.2@103.774,123.397
DRV_EXT_CON.READY_DRV_3: P1.14 U6.3 | length 8.1
  Bottom Layer w0.305: U6.3@98.375,120.984 98.331,121.028 98.331,126.652 98.933,127.254 99.206,127.254 99.46,127.508 P1.14@99.46,128.413
DRV_EXT_CON.READY_DRV_4: P1.15 U6.2 | length 10.7
  Bottom Layer w0.305: P1.15@96.92,130.953 98.178,129.695 98.178,127.642 97.725,127.189 U6.2@97.725,120.984
ENABLE: U1_Drive1.21 U1_Drive2.21 U1_Drive3.21 U1_Drive4.21 U8.7 | length 192.6
  Top Layer w0.508: U1_Drive4.21@55.499,26.75 51.863,26.75 50.292,28.321 50.292,62.865 52.023,64.596 U1_Drive3.21@55.499,64.596 64.088,64.596 v2(64.643,65.151) ; U1_Drive2.21@77.978,41.99 75.485,41.99 74.549,42.926 74.549,78.359 76.026,79.836 U1_Drive1.21@77.978,79.836 102.696,79.836 v1(105.41,82.55)
  Bottom Layer w0.305: 105.985,106.299 107.569,107.883 107.569,114.427 109.917,116.775 U8.7@109.917,117.711
  Bottom Layer w0.508: v2(64.643,65.151) 64.643,79.197 65.71,80.264 75.057,80.264 75.485,79.836 U1_Drive1.21@77.978,79.836 ; v1(105.41,82.55) 105.41,105.724 105.985,106.299
ENC_A_DIFF_N1: P3_Drive1.5 R3.1 U1_Drive1.14 U2.7 | length 64.8
  Top Layer w0.254: P3_Drive1.5@112.649,98.124 112.649,99.347 116.252,102.95 122.149,102.95 122.53,102.95 123.292,102.95 123.292,102.179 124.054,102.179 124.054,102.95 124.384,102.95 124.797,102.95 126.619,104.772 126.619,114.844 123.273,118.19 119.173,118.19 R3.1@119.046,118.317 118.394,118.317 117.632,117.555 U2.7@116.379,117.555
  Bottom Layer w0.254: P3_Drive1.5@112.649,98.124 113.919,96.854 113.919,95.076 111.76,92.917 111.76,77.804 112.268,77.296 U1_Drive1.14@113.538,77.296
ENC_A_DIFF_N2: P3_Drive2.5 R4.1 U1_Drive2.14 U2.9 | length 207.8
  Top Layer w0.254: P3_Drive2.5@107.489,9.351 106.687,8.549 106.687,7.903 107.525,7.065 113.328,7.065 114.681,8.418 114.681,13.923 113.11,15.494 85.134,15.494 84.617,16.011 84.347,16.281 83.686,15.619 83.147,16.158 83.808,16.819 83.269,17.358 82.71,16.799 82.172,17.338 82.731,17.897 82.318,18.31 82.042,18.586 82.042,37.568 82.693,38.219 83.685,38.219 v1(83.82,38.354) 84.88,38.354 85.642,39.116 113.204,39.116 U1_Drive2.14@113.538,39.45 U1_Drive2.14@113.919,39.45
  Top Layer w0.381: v1(105.791,118.698) 105.791,119.57 106.824,120.603 108.741,120.603 108.85,120.541 R4.1@108.956,120.48 ; R4.1@108.886,120.603 109.201,120.603 U2.9@110.979,118.825
  Bottom Layer w0.254: v1(83.82,38.354) 83.82,72.136 92.642,80.958 101.405,80.958 104.75,84.303 104.75,114.83 105.283,115.364 105.283,116.793 105.791,117.301 v1(105.791,118.698)
ENC_A_DIFF_N3: P3_Drive3.5 R6.1 U1_Drive3.14 U5.15 | length 144.3
  Top Layer w0.254: P3_Drive3.5@17.526,97.616 17.526,97.028 18.796,95.758 18.796,93.726 19.177,93.345 36.659,93.345 38.608,91.396 38.608,70.91 35.85,68.152 20.955,68.152 U1_Drive3.14@19.939,67.136 ; v1(20.828,101.854) 21.26,102.286 47.854,102.286 57.455,111.887 81.69,111.887 82.118,111.459 R6.1@82.616,111.459 85.198,111.459 85.833,112.094 U5.15@87.884,112.094
  Bottom Layer w0.254: P3_Drive3.5@17.526,97.616 17.526,98.349 18.31,99.133 18.31,101.342 18.821,101.854 v1(20.828,101.854)
ENC_A_DIFF_N4: P3_Drive4.5 R7.1 U1_Drive4.14 U5.7 | length 210.5
  Top Layer w0.254: U1_Drive4.14@19.939,29.29 21.024,30.375 22.247,30.375 26.035,26.587 26.035,13.148 25.313,12.426 25.313,10.882 26.543,9.652 P3_Drive4.5@26.543,9.351 27.345,8.549 27.345,6.739 29.004,5.08 56.979,5.08 69.088,17.189 69.088,82.753 75.921,89.586 93.955,89.586 99.463,95.094 99.463,108.353 100.381,109.271 100.381,110.711 101.346,111.677 101.346,116.415 99.448,118.313 99.448,119.448 98.992,119.905 R7.1@96.459,119.905 95.126,118.571 93.411,118.571 U5.7@93.284,118.444
ENC_A_DIFF_P1: C12.2 P3_Drive1.6 U1_Drive1.12 U2.6 | length 64.8
  Top Layer w0.254: P3_Drive1.6@112.649,95.584 112.649,96.092 111.419,97.322 111.419,99.882 114.995,103.458 124.587,103.458 126.111,104.982 126.111,114.634 125.271,115.474 C12.2@121.205,115.474 118.636,115.474 117.825,116.285 U2.6@116.379,116.285
  Bottom Layer w0.254: P3_Drive1.6@112.649,95.584 112.649,94.568 111.252,93.171 111.252,75.772 112.268,74.756 U1_Drive1.12@113.538,74.756
ENC_A_DIFF_P2: C11.1 P3_Drive2.6 U1_Drive2.12 U2.10 | length 207.8
  Top Layer w0.254: v1@82.931,37.465 82.55,37.084 82.55,18.796 85.344,16.002 113.32,16.002 115.189,14.133 115.189,8.208 113.538,6.557 107.315,6.557 106.179,7.693 106.179,10.581 P3_Drive2.6@107.489,11.891 ; v1(83.058,37.338) 84.582,37.338 85.852,38.608 111.84,38.608 U1_Drive2.12@113.538,36.91
  Top Layer w0.381: v1(104.775,117.682) 105.41,117.047 106.807,117.047 C11.1@107.188,117.428 107.442,117.428 108.204,116.666 108.966,116.666 109.855,117.555 U2.10@110.979,117.555 ; U1_Drive2.12@113.538,36.91 U1_Drive2.12@113.919,36.91
  Bottom Layer w0.254: v1@82.939,37.735 82.939,38.719 83.312,39.092 83.312,72.346 92.431,81.466 101.194,81.466 104.242,84.513 104.242,115.041 104.775,115.574 v1(104.775,117.682)
ENC_A_DIFF_P3: C17.1 P3_Drive3.6 U1_Drive3.12 U5.14 | length 144.4
  Top Layer w0.254: P3_Drive3.6@17.526,95.076 17.526,94.278 18.967,92.837 36.449,92.837 38.1,91.186 38.1,71.12 35.64,68.66 20.955,68.66 U1_Drive3.12@19.939,69.676 ; v1(19.939,100.965) 19.939,102.311 20.422,102.794 47.643,102.794 57.244,112.395 80.772,112.395 81.407,113.03 81.407,113.792 81.995,114.38 C17.1@84.902,114.38 85.529,114.38 86.545,113.364 U5.14@87.884,113.364
  Bottom Layer w0.254: P3_Drive3.6@17.526,95.076 18.818,96.368 18.818,99.844 v1(19.939,100.965)